# Altium PCB Relay_Controller_REV3.PcbDoc
Units mm, origin at the board's own origin, x right, y up, seen from the top; angles counter-clockwise.
Board outline 127.25 x 101.6 mm, 2 copper layers (Top Layer, Bottom Layer); 81 components, 50 nets, 297 pads, 98 vias.
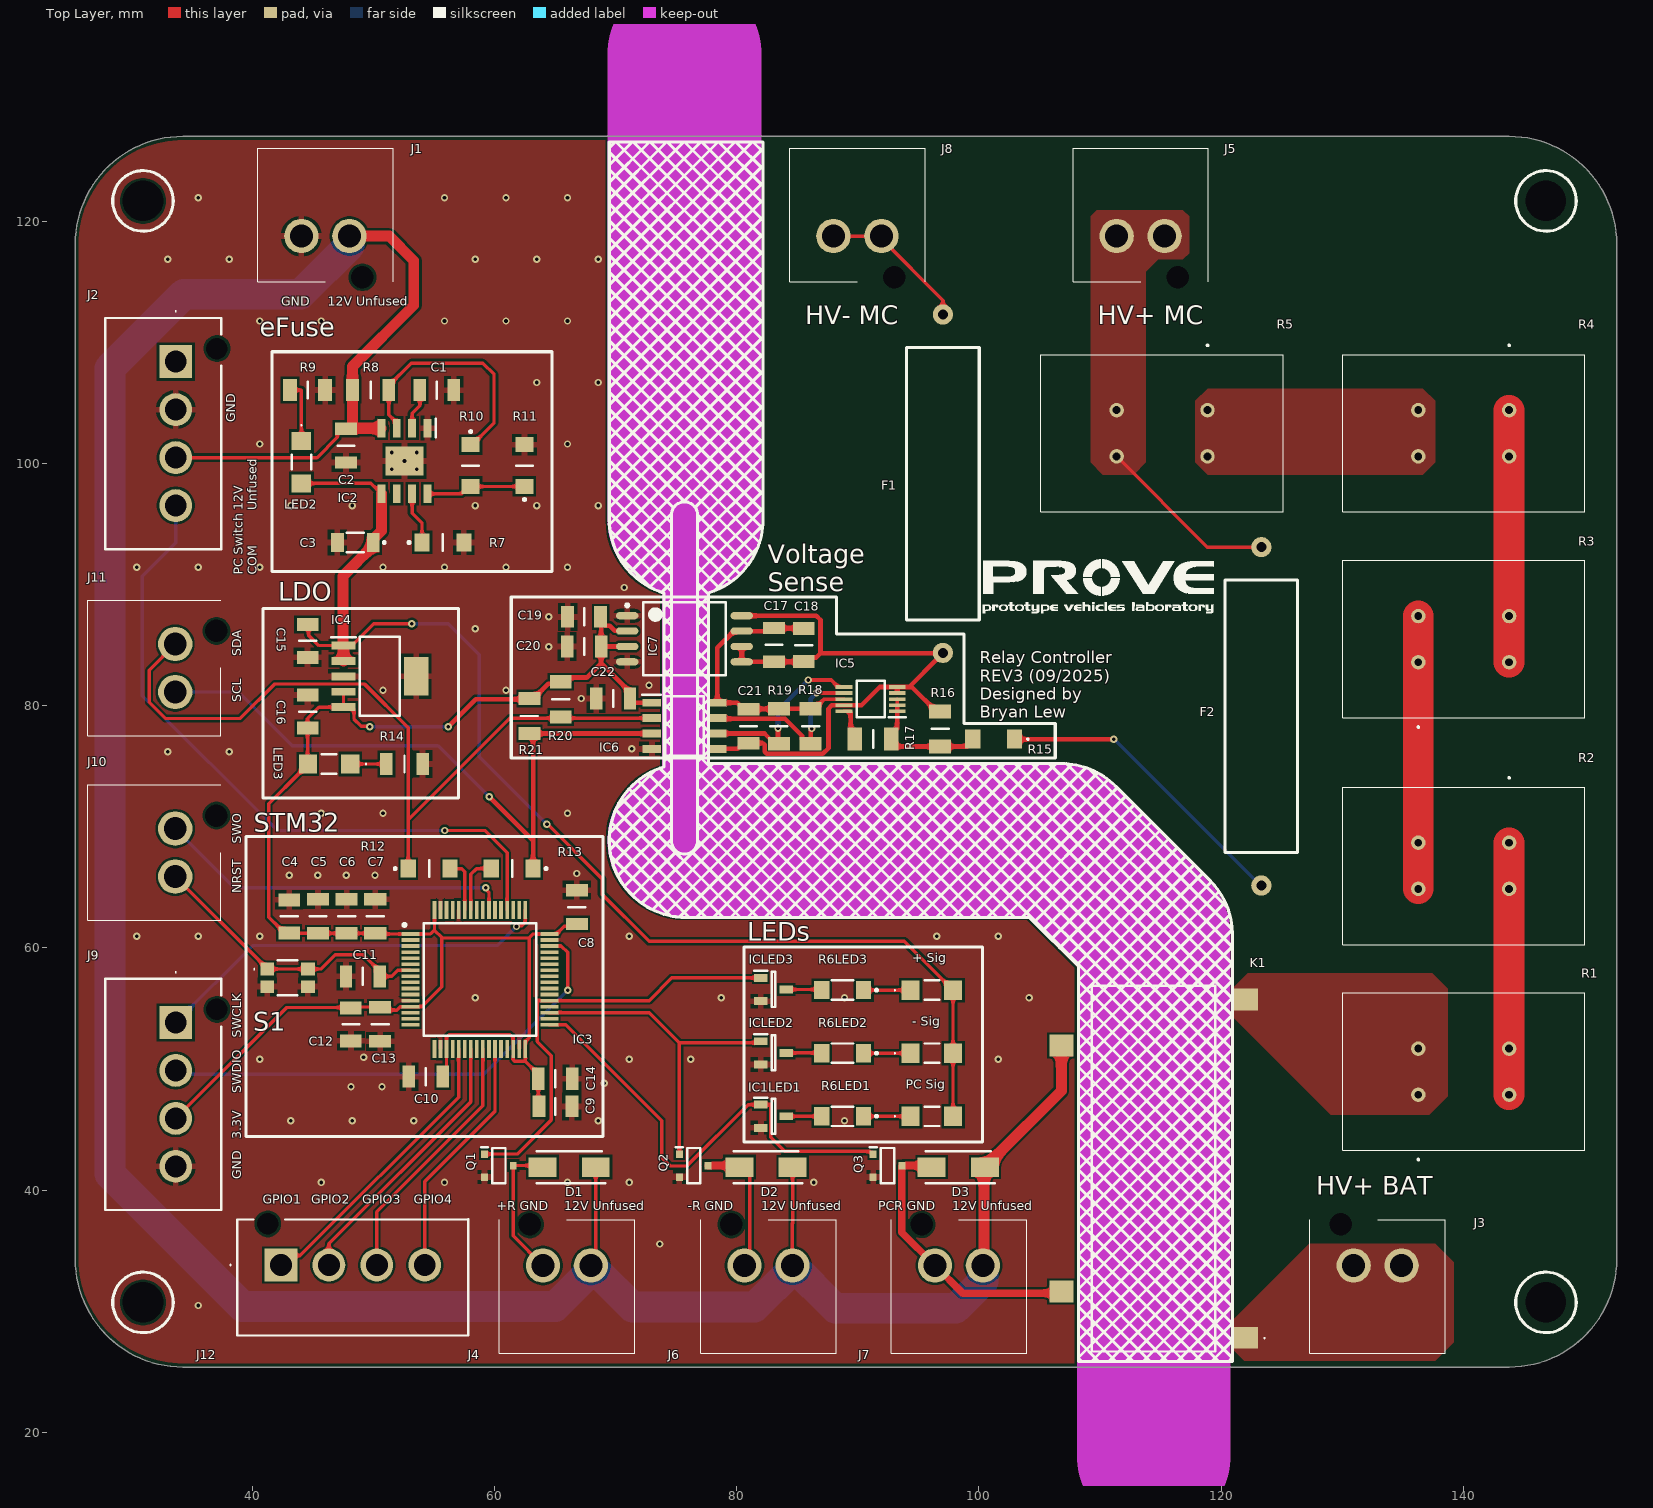
[diagram p0: Top Layer view]
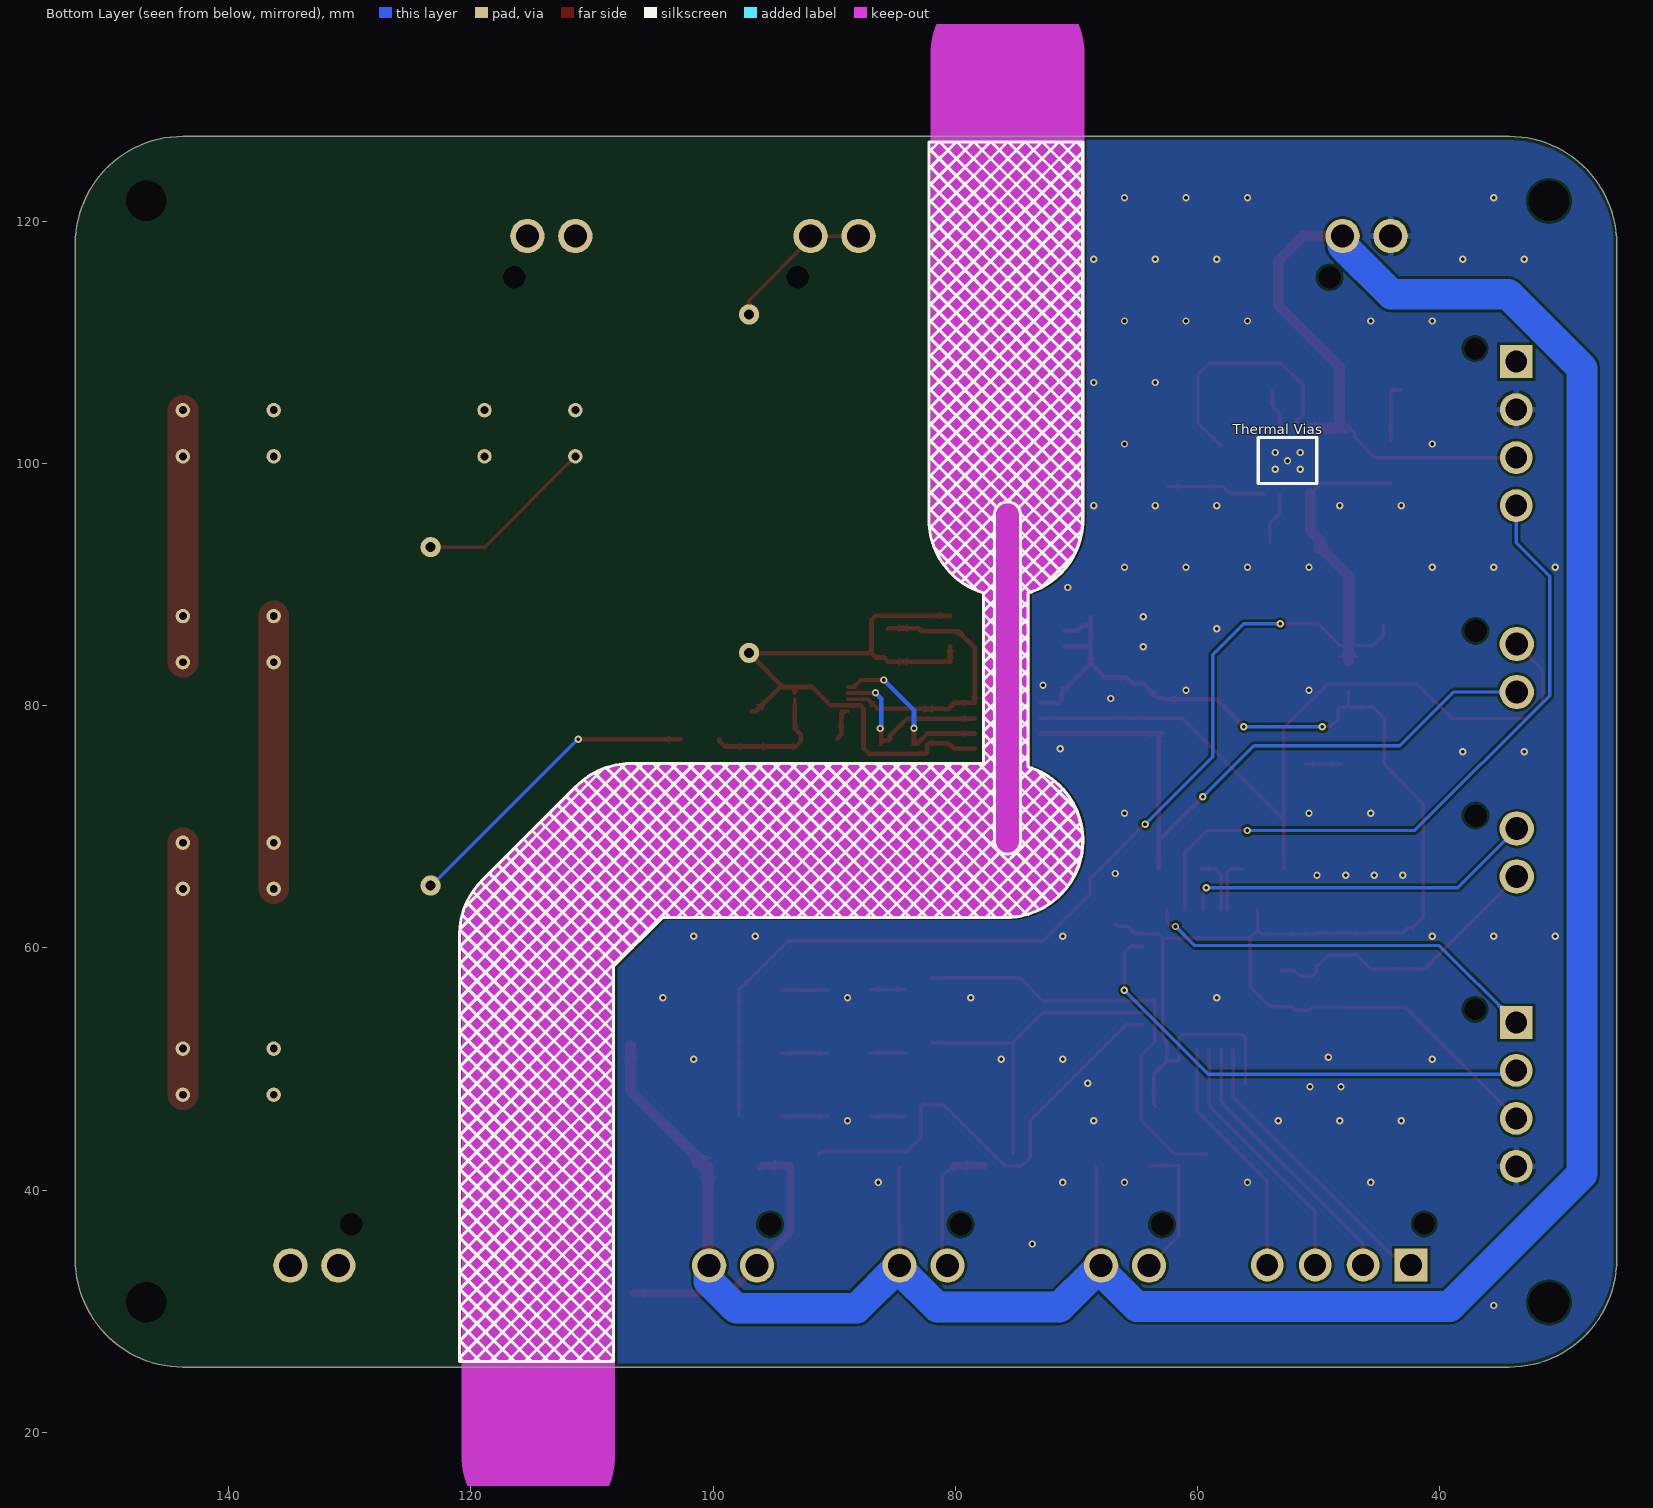
[diagram p1: Bottom Layer view, seen from below]
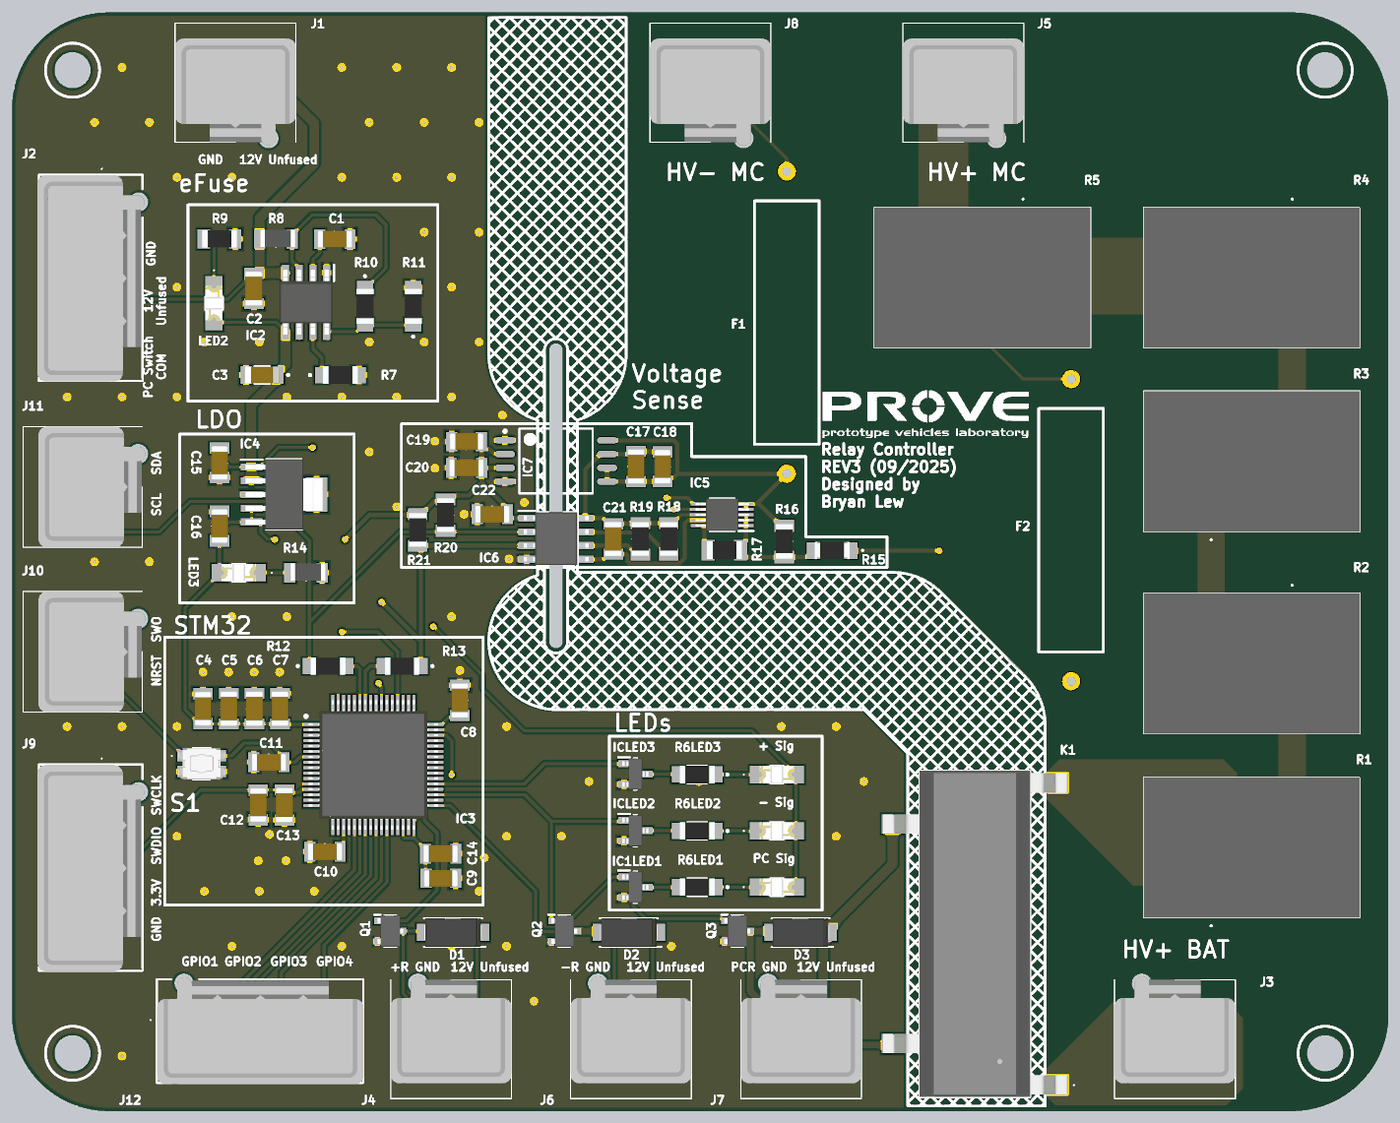
[diagram p2: 3D render of the assembled board from above, using the file's embedded part models]

## Layer stack, top to bottom
Top Solder: solder mask 0.0102, Solder Resist, Dk 3.5
Top Layer: signal copper 0.0356
Dielectric 1: dielectric 0.32, FR-4, Dk 4.8
Bottom Layer: signal copper 0.0356
Bottom Solder: solder mask 0.0102, Solder Resist, Dk 3.5

## Board outline
25.4,34.29 25.4,118.11 cw(c34.29,118.11) 34.29,127 143.764,127 cw(c143.764,118.11) 152.654,118.11 152.654,34.29 cw(c143.764,34.29) 143.764,25.4 34.29,25.4 cw(c34.29,34.29)
cut-out: 75.057,68.834 ccw(c75.692,68.834) 76.327,68.834 76.327,95.758 ccw(c75.692,95.758) 75.057,95.758

## Design rules (kind name [scope] priority, off if disabled: settings)
BoardOutlineClearance [All] p1: gap=0.3 ignorepadtopadclearanceinfootprint=FALSE except(0.4: Arc-SplitBarrior Arc-SplitContinuation Track-SplitBarrior Track-SplitContinuation SMDPad-SplitBarrior SMDPad-SplitContinuation THPad-SplitBarrior THPad-SplitContinuation Via-SplitBarrior Via-SplitContinuation Fill-SplitBarrior Fill-SplitContinuation Poly-SplitBarrior Poly-SplitContinuation Region-SplitBarrior Region-SplitContinuation Text-SplitBarrior Text-SplitContinuation)
Clearance "Clearance Different Nets" [All] p1: gap=0.2 ignorepadtopadclearanceinfootprint=FALSE except(0.089: Arc-Arc Arc-Track Arc-SMDPad Track-Track Track-SMDPad; 0.127: SMDPad-SMDPad SMDPad-Via THPad-Via Via-Via; 0.254: Arc-Via Arc-Text Track-Via Track-Text SMDPad-Text THPad-Text Via-Text Fill-Text Poly-Text Region-Text Text-Text; 0.5: THPad-THPad Via-Hole)
Clearance "Clearance Same Nets" [All] p2: gap=0.2 ignorepadtopadclearanceinfootprint=FALSE except(0.089: Arc-Arc Arc-Track Arc-SMDPad Track-Track Track-SMDPad SMDPad-SMDPad; 0.127: SMDPad-Via THPad-Via; 0.254: Arc-Via Arc-Text Track-Via Track-Text SMDPad-Text THPad-Text Via-Via Via-Text Fill-Text Poly-Text Region-Text Text-Text)
Clearance "Clearance Bottom Layer" [OnLayer('Bottom Layer')] p3: gap=0.203 ignorepadtopadclearanceinfootprint=TRUE except(0.254: Arc-Text Track-Text SMDPad-Text THPad-Text Via-Text Fill-Text Poly-Text Region-Text Text-Text)
Clearance "Clearance Top Layer" [OnLayer('Top Layer')] p4: gap=0.203 ignorepadtopadclearanceinfootprint=TRUE except(0.254: Arc-Text Track-Text SMDPad-Text THPad-Text Via-Text Fill-Text Poly-Text Region-Text Text-Text)
HoleSize [All] p1: absolutevalues=TRUE maxlimit=6.3 minlimit=0.2 maxpercent=80.000 minpercent=20.000
MinimumAnnularRing [All] p1: minimumring=0.13
MinimumSolderMaskSliver [All] p1: minsoldermaskwidth=0.1
PolygonConnect PolygonConnectPowerPads [InPolygonClass('PowerPolygons')] p1: connectstyle=Direct reliefconductorwidth=0.254 reliefentries=4 polygonreliefangle="90 Angle" airgapwidth=0.254
PolygonConnect PolygonConnect_1 [All] p2: thpad.connectstyle=Relief thpad.reliefconductorwidth=0.508 thpad.reliefentries=4 thpad.polygonreliefangle="90 Angle" thpad.airgapwidth=0.254 smdpad.connectstyle=Relief smdpad.reliefconductorwidth=0.508 smdpad.reliefentries=4 smdpad.polygonreliefangle="90 Angle" smdpad.airgapwidth=0.254 via.connectstyle=Direct via.reliefconductorwidth=0.508 via.reliefentries=4 via.polygonreliefangle="90 Angle" via.airgapwidth=0.254
RoutingCorners [All] p1: cornerstyle=Round minsetback=2.54 maxsetback=2.54
RoutingVias [All] p1: holewidth=0.5 width=1 viastyle="Through Hole" minholewidth=0.2 minwidth=0.35 maxholewidth=1 maxwidth=2
SilkToSilkClearance [All] p1: silktosilkclearance=0.1
SilkToSolderMaskClearance [IsPad] p1: minsilkscreentomaskgap=0.1 clearancetoexposedcopper=TRUE
SolderMaskExpansion [All] p1: expansion=0.102 istentingtop=FALSE
SupplyNets "Schematic Supply Nets" [InNet('GND')] p1: voltage=0.000
Width [All] p1: maxlimit=2.54 minlimit=0.089 preferedwidth=0.381
25 further rules are at their usual default settings.

## Classes and differential pairs
component class "3.3V Isolation": C17 C18 C19 C20 IC7
polygon class PowerPolygons: HV+_BAT_L01_P007 HV+_MC_UNFUSED_L01_P010 NETK1_2_L01_P009 NETR4_2_L01_P008
channel class LED_Driver: U_LED1 U_LED2 U_LED3
component class VoltageSense: C21 C22 F1 F2 IC5 IC6 R15 R16 R17 R18 R19 R20 R21
component class U_LED3: IC1_U_LED3 LED1_U_LED3 R6_U_LED3
component class U_LED2: IC1_U_LED2 LED1_U_LED2 R6_U_LED2
component class U_LED1: IC1_U_LED1 LED1_U_LED1 R6_U_LED1
component class STM32: C4 C5 C6 C7 C8 C9 C10 C11 C12 C13 C14 IC3 R12 R13 S1
component class "Relay Controller": D1 D2 D3 K1 Q1 Q2 Q3 R1 R2 R3 R4 R5
component class eFuse: C1 C2 C3 IC2 LED2 R7 R8 R9 R10 R11
component class Connectors: J1 J2 J3 J4 J5 J6 J7 J8 J9 J10 J11 J12
component class "12V to 3.3V LDO": C15 C16 IC4 LED3 R14

## Components (designator, comment, footprint, x,y, rotation, side; value= is the part's Value field where it differs from the comment)
"+ Sig" "156120VS75000" 156120VS75000 96.114,56.515 r0 top (schematic designator LED1)
"- Sig" "156120VS75000" 156120VS75000 96.114,51.308 r0 top (schematic designator LED1)
C1 "2.2n" CAPC3216X94N 55.245,106.045 r0 top
C2 "100n" CAPC3216X94N 47.752,101.473 r270 top
C3 "100u" GRM31x 48.514,93.472 r180 top
C4 "4.7u" CAPC3216X180N 43.053,62.611 r90 top
C5 "100n" CAPC3216X94N 45.437,62.611 r90 top
C6 "100n" CAPC3216X94N 47.801,62.611 r90 top
C7 "100n" CAPC3216X94N 50.165,62.611 r90 top
C8 "100n" CAPC3216X94N 66.802,63.373 r90 top
C9 "100n" CAPC3216X94N 65.024,49.2 r0 top
C10 "100n" CAPC3216X94N 54.331,49.378 r180 top
C11 "100n" CAPC3216X94N 49.149,57.658 r180 top
C12 "1u" CAPC3216X180N 48.158,53.696 r270 top
C13 "100n" CAPC3216X94N 50.571,53.696 r270 top
C14 "4.7u" CAPC3216X180N 65.039,46.914 r0 top
C15 "10u" CAPC3216X180N 44.577,85.344 r270 top
C16 "10u" CAPC3216X180N 44.577,79.502 r90 top
C17 "100n" CAPC3216X94N 83.083,85.014 r270 top
C18 "22u" CAPC3216X180N 85.547,84.999 r270 top
C19 "10u" CAPC3216X180N 67.412,87.325 r180 top
C20 "100n" CAPC3216X94N 67.412,84.887 r180 top
C21 "100n" CAPC3216X94N 80.975,78.308 r270 top
C22 "100n" CAPC3216X94N 69.8,80.594 r180 top
D1 "RGF1M-E3_67A" DIOM5426X300N 66.167,41.907 r180 top
D2 "RGF1M-E3_67A" DIOM5426X300N 82.423,41.907 r180 top
D3 "RGF1M-E3_67A" DIOM5426X300N 98.298,41.907 r180 top
F1 "0ADKP0500-RE" 0ADKP0500-RE 97.028,98.323 r270 top locked
F2 "0ADKP0500-RE" 0ADKP0500-RE 123.317,79.121 r90 top locked
IC1LED1 "DMN61D8LQ-13" SOT96P240X110-3N 83.033,46.101 r0 top (schematic designator IC1)
IC2 "TPS259630DDAR" SOIC127P600X170-9N 52.578,100.203 r270 top locked
IC3 "STM32F401RET7" QFP50P1200X1200X160-64N 58.801,57.404 r0 top
IC4 "TL1963A-33DCQT" SOT127P706X180-6N 50.546,82.423 r0 top
IC5 "LTC4151IMS#PBF" SOP50P490X110-10N 91.059,80.543 r180 top
IC6 "ISO1640BQDRQ1" SOIC127P600X175-8N 75.698,78.334 r0 top
IC7 "MIE05W0505BGYE-3R-Z" SOIC127P1030X265-8N 75.692,85.522 r0 top
ICLED2 "DMN61D8LQ-13" SOT96P240X110-3N 83.033,51.336 r0 top (schematic designator IC1)
ICLED3 "DMN61D8LQ-13" SOT96P240X110-3N 83.033,56.571 r0 top (schematic designator IC1)
J1 "1877285-2" 18772852 46.049,115.007 r180 top
J2 "1877285-4" 18772854 33.695,108.4 r270 top
J3 "1877285-2" 18772852 132.917,37.542 r0 top
J4 "1877285-2" 18772852 65.988,37.542 r0 top
J5 "1877285-2" 18772852 113.352,115.007 r180 top
J6 "1877285-2" 18772852 82.625,37.542 r0 top
J7 "1877285-2" 18772852 98.35,37.542 r0 top
J8 "1877285-2" 18772852 89.968,115.007 r180 top
J9 "1877285-4" 18772854 33.695,53.848 r270 top
J10 "1877285-2" 18772852 37.415,67.87 r270 top
J11 "1877285-2" 18772852 37.415,83.11 r270 top
J12 "1877285-4" 18772854 42.372,33.822 r0 top
K1 "KT12-1A-40L-SMD" KT121A40LSMD 114.427,41.783 r90 top locked
LED2 "156120VS75000" 156120VS75000 44.069,100.104 r270 top locked
LED3 "156120VS75000" 156120VS75000 46.355,75.184 r180 top
"PC Sig" "156120VS75000" 156120VS75000 96.114,46.101 r0 top (schematic designator LED1)
Q1 "SSM3K357R,LF" SOTFL95P240X88-3N 60.37,42.035 r0 top
Q2 "SSM3K357R,LF" SOTFL95P240X88-3N 76.454,42.035 r0 top
Q3 "SSM3K357R,LF" SOTFL95P240X88-3N 92.456,42.035 r0 top
R1 "TWW20J100E" TWW20J100E 136.271,47.879 r0 top
R2 "TWW20J100E" TWW20J100E 143.771,68.687 r180 top
R3 "TWW20J100E" TWW20J100E 136.271,83.586 r0 top
R4 "TWW20J100E" TWW20J100E 143.771,104.394 r180 top locked
R5 "TWW20J100E" TWW20J100E 118.872,104.394 r180 top
R6LED1 "ERA-8VEB4750V" ERA8KEB1004V 88.748,46.101 r180 top (schematic designator R6)
R6LED2 "ERA-8VEB4750V" ERA8KEB1004V 88.748,51.308 r180 top (schematic designator R6)
R6LED3 "ERA-8VEB4750V" ERA8KEB1004V 88.748,56.515 r180 top (schematic designator R6)
R7 "909" ERJ8ENF1000V 55.753,93.472 r0 top
R8 "464k" RESC3216X60N 49.784,106.055 r0 top
R9 "0.51k" RESC3216X65N 44.577,106.055 r0 top
R10 "33.2k" ERJ8ENF1000V 58.039,99.822 r270 top
R11 "47.5k" ERJ8ENF1000V 62.484,99.822 r90 top
R12 "33" ERJ8ENF1000V 54.61,66.548 r0 top
R13 "33" ERJ8ENF1000V 61.468,66.548 r180 top
R14 "62" RESC3216X60N 52.578,75.184 r0 top
R15 "330k" ERJP08_(1206) 101.219,77.241 r180 top
R16 "100k" RESC3216X65N 96.799,78.08 r90 top
R17 "0.02" RESC3216X68N 91.262,77.267 r180 top
R18 "2k" RESC3116X65N 86.106,78.308 r270 top
R19 "2k" RESC3116X65N 83.49,78.308 r270 top
R20 "2k" RESC3116X65N 65.481,80.518 r270 top
R21 "2k" RESC3116X65N 62.89,79.146 r270 top
S1 "TL1030AF350AQJ" TL1030AF350AQJ 42.926,57.531 r0 top

## Footprints (in the part's own frame and the unit in brackets; to place one, negate y for a bottom-side part, rotate by r counter-clockwise, add the part's x,y. Pads: shape width x height; smd on the part's side, far side on the other; paste and mask are expansions set on the pad)
0ADKP0500-RE [mil]
  round 66 hole 33: 1(-550,0) 2(550,0)
  Multi-Layer pour cut-out: -443,118 -443,-118 443,-118 443,118
  silkscreen extent -443,-118 443,118
156120VS75000 [mm]
  rect 1.5x1.6 smd: 1(-1.75,0) 2(1.75,0)
  silkscreen extent -3.1,-0.8 0.6,0.8, body extent -1.6,-0.8 1.6,0.8, height 1.2
18772852 [mm]
  round 2.835 hole 1.89: 1(-1.98,-3.76) 2(1.98,-3.76)
  round 0.93 hole 1.86 unplated: 3(-3.06,-0.36)
  silkscreen extent -5.59,-11 5.59,0, body extent -5.59,-9.58 5.59,0.3, height 11.91
18772854 [mm]
  rect 2.715x2.715 hole 1.81: 1(0,0)
  round 2.715 hole 1.81: 2(3.96,0) 3(7.92,0) 4(11.88,0)
  round 0.89 hole 1.78 unplated: 5(-1.08,3.4)
  silkscreen extent -4.2,-5.82 15.49,3.77, body extent -3.56,-5.96 15.53,3.93, height 11.86
CAPC3216X94N [mm]
  rect 1.02x1.82 smd: 1(-1.4,0) 2(1.4,0)
  silkscreen extent 0,-0.7 0,0.7, body extent -1.6,-0.8 1.6,0.8, height 0.94
CAPC3216X180N [mm]
  rect 1.07x1.78 smd: 1(-1.36,0) 2(1.36,0)
  silkscreen extent 0,-0.7 0,0.7, body extent -1.6,-0.8 1.6,0.8, height 1.8
DIOM5426X300N [mm]
  rect 2.3x1.6 smd: 1(-2.2,0) 2(2.2,0)
  silkscreen extent -3,-1.32 2.68,1.32, body extent -2.68,-1.32 2.68,1.32, height 3
ERA8KEB1004V [mm]
  rect 1.25x1.5 smd: 1(-1.725,0) 2(1.725,0)
  silkscreen extent -2.9,-0.8 0.9,0.8, body extent -1.6,-0.8 1.6,0.8, height 0.65
ERJ8ENF1000V [mm]
  rect 1.25x1.5 smd: 1(-1.725,0) 2(1.725,0)
  silkscreen extent -2.9,-0.67 0,0.67, body extent -1.6,-0.8 1.6,0.8, height 0.6
ERJP08_(1206) [mm]
  rect 1.25x1.55 smd: 1(-1.725,0) 2(1.725,0)
  silkscreen extent -2.88,-0.05 -2.78,0.05, body extent -1.6,-0.8 1.6,0.8, height 0.6
GRM31x [mm]
  rect 1.05x1.6 smd: 1(-1.475,0) 2(1.475,0)
  silkscreen extent -2.5,-0.8 0.7,0.8, body extent -1.6,-0.8 1.6,0.8, height 1
KT121A40LSMD [mm]
  rect 1.8x2 smd: 1(-13.97,-7.62) 2(13.97,-7.62) 3(10.15,7.62) 4(-10.15,7.62)
  silkscreen extent -15.1,-9.2 15.1,5.1, body extent -15.1,-8.5 15.1,8.5, height 8.71
QFP50P1200X1200X160-64N [mm]
  rect 1.475x0.3 smd: 1(-5.738,3.75) 2(-5.738,3.25) 3(-5.738,2.75) 4(-5.738,2.25) 5(-5.738,1.75) 6(-5.738,1.25) 7(-5.738,0.75) 8(-5.738,0.25) 9(-5.738,-0.25) 10(-5.738,-0.75) 11(-5.738,-1.25) 12(-5.738,-1.75) 13(-5.738,-2.25) 14(-5.738,-2.75) 15(-5.738,-3.25) 16(-5.738,-3.75) 33(5.738,-3.75) 34(5.738,-3.25) 35(5.738,-2.75) 36(5.738,-2.25) 37(5.738,-1.75) 38(5.738,-1.25) 39(5.738,-0.75) 40(5.738,-0.25) 41(5.738,0.25) 42(5.738,0.75) 43(5.738,1.25) 44(5.738,1.75) 45(5.738,2.25) 46(5.738,2.75) 47(5.738,3.25) 48(5.738,3.75)
  rect 0.3x1.475 smd: 17(-3.75,-5.738) 18(-3.25,-5.738) 19(-2.75,-5.738) 20(-2.25,-5.738) 21(-1.75,-5.738) 22(-1.25,-5.738) 23(-0.75,-5.738) 24(-0.25,-5.738) 25(0.25,-5.738) 26(0.75,-5.738) 27(1.25,-5.738) 28(1.75,-5.738) 29(2.25,-5.738) 30(2.75,-5.738) 31(3.25,-5.738) 32(3.75,-5.738) 49(3.75,5.738) 50(3.25,5.738) 51(2.75,5.738) 52(2.25,5.738) 53(1.75,5.738) 54(1.25,5.738) 55(0.75,5.738) 56(0.25,5.738) 57(-0.25,5.738) 58(-0.75,5.738) 59(-1.25,5.738) 60(-1.75,5.738) 61(-2.25,5.738) 62(-2.75,5.738) 63(-3.25,5.738) 64(-3.75,5.738)
  silkscreen extent -6.35,-4.65 4.65,4.65, body extent -6,-6 6,6, height 1.6
RESC3116X65N [mm]
  rect 1.1x1.8 smd: 1(-1.45,0) 2(1.45,0)
  silkscreen extent 0,-0.7 0,0.7, body extent -1.55,-0.8 1.55,0.8, height 0.65
RESC3216X60N [mm]
  rect 1.05x1.8 smd: 1(-1.5,0) 2(1.5,0)
  silkscreen extent 0,-0.7 0,0.7, body extent -1.42,-0.74 1.78,0.86, height 0.55
RESC3216X65N [mm]
  rect 1.15x1.8 smd: 1(-1.45,0) 2(1.45,0)
  silkscreen extent 0,-0.7 0,0.7, body extent -1.6,-0.8 1.6,0.8, height 0.65
RESC3216X68N [mm]
  rect 1.2x1.9 smd: 1(-1.5,0) 2(1.5,0)
  silkscreen extent 0,-0.72 0,0.72, body extent -1.6,-0.82 1.6,0.82, height 0.68
SOIC127P600X170-9N [mm]
  rect 1.525x0.65 smd: 1(-2.712,1.905) 2(-2.712,0.635) 3(-2.712,-0.635) 4(-2.712,-1.905) 5(2.712,-1.905) 6(2.712,-0.635) 7(2.712,0.635) 8(2.712,1.905)
  rect 2.4x3.1 smd: 9(0,0)
  silkscreen extent -3.47,2.58 -1.95,2.58, body extent -3,-2.45 3,2.45, height 1.57
SOIC127P600X175-8N [mm]
  rect 1.525x0.65 smd: 1(-2.712,1.905) 2(-2.712,0.635) 3(-2.712,-0.635) 4(-2.712,-1.905) 5(2.712,-1.905) 6(2.712,-0.635) 7(2.712,0.635) 8(2.712,1.905)
  silkscreen extent -3.47,-2.45 1.6,2.58, body extent -3,-2.45 3,2.45, height 1.75
SOIC127P1030X265-8N [mm] "SOIC, 8-Leads, Body 5.85x7.50mm, Pitch 1.27mm, IPC Medium Density"
  oval 1.85x0.6 smd: 1(-4.725,1.905) 2(-4.725,0.635) 3(-4.725,-0.635) 4(-4.725,-1.905) 5(4.725,-1.905) 6(4.725,-0.635) 7(4.725,0.635) 8(4.725,1.905)
  silkscreen extent -4.85,-3 3.4,3, body extent -3.8,-3 3.8,3, height 2.65
SOP50P490X110-10N [mm]
  rect 1.4x0.3 smd: 1(-2.2,1) 2(-2.2,0.5) 3(-2.2,0) 4(-2.2,-0.5) 5(-2.2,-1) 6(2.2,-1) 7(2.2,-0.5) 8(2.2,0) 9(2.2,0.5) 10(2.2,1)
  silkscreen extent -2.9,-1.5 1.15,1.5, body extent -2.46,-1.5 2.46,1.5, height 1.1
SOT96P240X110-3N [mm]
  rect 1.1x0.65 smd: 1(-1.05,0.96) 2(-1.05,-0.96) 3(1.05,0)
  silkscreen extent -1.6,-1.45 0.15,1.54, body extent -1.2,-1.45 1.2,1.45, height 1.1
SOT127P706X180-6N [mm]
  rect 2x0.65 smd: 1(-3,2.54) 2(-3,1.27) 3(-3,0) 4(-3,-1.27) 5(-3,-2.54)
  rect 2x3.2 smd: 6(3,0)
  silkscreen extent -4,-3.25 1.65,3.25, body extent -3.55,-3.25 3.55,3.25, height 1.66
SOTFL95P240X88-3N [mm]
  rect 0.575x0.62 smd: 1(-1.188,0.95) 2(-1.188,-0.95) 3(1.188,0)
  silkscreen extent -1.48,-1.45 0.55,1.51, body extent -1.2,-1.45 1.2,1.45, height 0.88
TL1030AF350AQJ [mm]
  rect 1.15x1.05 smd: 1(-1.675,0.725) 2(-1.675,-0.725) 3(1.675,0.725) 4(1.675,-0.725)
  silkscreen extent -2.8,-1.45 0.8,1.45, body extent -2.16,-1.45 2.16,1.45, height 1.71
TWW20J100E [mm]
  round 1.192 hole 0.65: 1(0,0) 2(7.5,0) 3(7.5,3.81) 4(0,3.81)
  silkscreen extent -6.25,-5.4 13.75,8.4, body extent -6.25,-4.59 13.75,8.4, height 46.1

## Part data
"+ Sig" "- Sig" LED2 LED3 "PC Sig": "LED", Manufacturer_Name="Wurth Elektronik", Mouser Part Number=710-156120VS75000, Datasheet Link=https://www.we-online.com/components/products/datasheet/156120VS75000.pdf, Height=1.3mm, Manufacturer_Part_Number=156120VS75000, Mouser Price/Stock=https://www.mouser.co.uk/ProductDetail/Wurth-Elektronik/156120VS75000?qs=2kOmHSv6VfQAUFg5BeuEfQ%3D%3D
C1: library part 1206YC222KAT2A, "Capacitor", Manufacturer_Name="Kyocera AVX", Mouser Part Number=581-1206YC222KAT2A, Manufacturer_Part_Number=1206YC222KAT2A, Mouser Price/Stock=https://www.mouser.co.uk/ProductDetail/AVX/1206YC222KAT2A?qs=CvOUr%252B7YgU7sng%252BvNa2zXQ%3D%3D
C2 C5 C6 C7 C8 C9 C10 C11 C13 C17 C20 C21 C22: library part 12065C104J4Z2A, "Capacitor", Manufacturer_Name="Kyocera AVX", Mouser Part Number=581-12065C104J4Z2A, Datasheet Link=https://spicat.kyocera-avx.com/product/mlcc/chartview/12065C104J4Z2A/DataSheet/X7R, Height=0.94mm, Manufacturer_Part_Number=12065C104J4Z2A, Mouser Price/Stock=https://www.mouser.com/Search/Refine.aspx?Keyword=581-12065C104J4Z2A
C3: library part GRM31CR60J107KEA8L, "Capacitor", Manufacturer_Name="Murata Electronics", Mouser Part Number=81-GRM31CR60J107KE8L, Datasheet Link=https://search.murata.co.jp/Ceramy/image/img/A01X/G101/ENG/GRM31CR60J107KEA8-01A.pdf, Height=1.25mm, Manufacturer_Part_Number=GRM31CR60J107KEA8L, Mouser Price/Stock=https://www.mouser.co.uk/ProductDetail/Murata-Electronics/GRM31CR60J107KEA8L?qs=pUKx8fyJudDzdyEEakAKPA%3D%3D
C4 C14: library part GMK316AB7475KLHT, "Capacitor", Manufacturer_Name="TAIYO YUDEN", Mouser Part Number=963-GMK316AB7475KLHT, Arrow Part Number=GMK316AB7475KLHT, Arrow Price/Stock=https://www.arrow.com/en/products/gmk316ab7475klht/taiyo-yuden?utm_currency=USD&region=nac, Datasheet Link=https://ds.yuden.co.jp/TYCOMPAS/ap/specSheet?pn=MMASG31LAB7475KTNA01, Height=1.8mm, Manufacturer_Part_Number=GMK316AB7475KLHT, Mouser Price/Stock=https://www.mouser.co.uk/ProductDetail/TAIYO-YUDEN/GMK316AB7475KLHT?qs=CNQs48zzdnoeKLJ9%2F6WNWQ%3D%3D
C12: library part HMK316B7105KLHT, "Capacitor", Manufacturer_Name="TAIYO YUDEN", Mouser Part Number=963-HMK316B7105KLHT, Arrow Part Number=HMK316B7105KLHT, Arrow Price/Stock=null?utm_currency=USD&region=nac, Datasheet Link=https://mouser.componentsearchengine.com/Datasheets/1/HMK316B7105KLHT.pdf, Height=1.8mm, Manufacturer_Part_Number=HMK316B7105KLHT, Mouser Price/Stock=https://www.mouser.co.uk/ProductDetail/TAIYO-YUDEN/HMK316B7105KLHT?qs=sz8xDBnIhcFmvpGfTAF0nQ%3D%3D
C15 C16 C19: library part MLASU31LBB5106KTNA01, "Capacitor", Manufacturer_Name="TAIYO YUDEN", Datasheet Link=https://mm.digikey.com/Volume0/opasdata/d220001/medias/docus/5731/MLR01_e.pdf, Height=1.8mm, Manufacturer_Part_Number=MLASU31LBB5106KTNA01
C18: library part GGM31CD70J226KE02L, "Capacitor", Manufacturer_Name="Murata Electronics", Datasheet Link=https://search.murata.co.jp/Ceramy/image/img/A01X/G101/ENG/GGM31CD70J226KE02-01.pdf, Height=1.8mm, Manufacturer_Part_Number=GGM31CD70J226KE02L
D1 D2 D3: "Diode", Arrow Part Number=RGF1M-E3/67A, Manufacturer_Name=Vishay, Mouser Part Number=625-RGF1M-E3, Arrow Price/Stock=https://www.arrow.com/en/products/rgf1m-e367a/vishay?region=nac, Datasheet Link=https://www.vishay.com/docs/88697/rgf1.pdf, Height=3mm, Manufacturer_Part_Number=RGF1M-E3/67A, Mouser Price/Stock=https://www.mouser.co.uk/ProductDetail/Vishay-General-Semiconductor/RGF1M-E3-67A?qs=4xyK702%2F%252BQ1dl%252BTCdyIThg%3D%3D
F1 F2: "Fuse"
IC1LED1 ICLED2 ICLED3: "Integrated Circuit", Manufacturer_Name="Diodes Incorporated", Mouser Part Number=621-DMN61D8LQ-13, Arrow Part Number=DMN61D8LQ-13, Arrow Price/Stock=https://www.arrow.com/en/products/dmn61d8lq-13/diodes-incorporated?utm_currency=USD&region=nac, Datasheet Link=https://www.diodes.com//assets/Datasheets/DMN61D8LQ.pdf, Height=1.1mm, Manufacturer_Part_Number=DMN61D8LQ-13, Mouser Price/Stock=https://www.mouser.co.uk/ProductDetail/Diodes-Incorporated/DMN61D8LQ-13?qs=DBvH5xl4UymJgoulTjiNCg%3D%3D
IC2: "Integrated Circuit", Manufacturer_Name="Texas Instruments", Mouser Part Number=595-TPS259630DDAR, Arrow Part Number=TPS259630DDAR, Arrow Price/Stock=https://www.arrow.com/en/products/tps259630ddar/texas-instruments, Datasheet Link=https://www.ti.com/lit/gpn/TPS2596, Height=1.7mm, Manufacturer_Part_Number=TPS259630DDAR, Mouser Price/Stock=https://www.mouser.co.uk/ProductDetail/Texas-Instruments/TPS259630DDAR?qs=T3oQrply3y%252BCA0rOFESTyA%3D%3D
IC3: "Integrated Circuit", Manufacturer_Name=STMicroelectronics, Mouser Part Number=511-STM32F401RET7, Arrow Part Number=STM32F401RET7, Arrow Price/Stock=https://www.arrow.com/en/products/stm32f401ret7/stmicroelectronics?utm_currency=USD&region=nac, Datasheet Link=https://www.arrow.com/en/products/stm32f401ret7/stmicroelectronics, Height=1.6mm, Manufacturer_Part_Number=STM32F401RET7, Mouser Price/Stock=https://www.mouser.co.uk/ProductDetail/STMicroelectronics/STM32F401RET7?qs=aVyJF2WnouSdX21y3k%2FIAA%3D%3D
IC4: "Integrated Circuit", Manufacturer_Name="Texas Instruments", Mouser Part Number=595-TL1963A-33DCQT, Arrow Part Number=TL1963A-33DCQT, Arrow Price/Stock=https://www.arrow.com/en/products/tl1963a-33dcqt/texas-instruments?utm_currency=USD&region=nac, Datasheet Link=http://www.ti.com/lit/gpn/TL1963A, Height=1.8mm, Manufacturer_Part_Number=TL1963A-33DCQT, Mouser Price/Stock=https://www.mouser.co.uk/ProductDetail/Texas-Instruments/TL1963A-33DCQT?qs=g0HfZ8wh75AyKD2vs560PQ%3D%3D
IC5: "Integrated Circuit", Manufacturer_Name="Analog Devices", Mouser Part Number=584-LTC4151IMS#PBF, Arrow Part Number=LTC4151IMS#PBF, Arrow Price/Stock=https://www.arrow.com/en/products/ltc4151imspbf/analog-devices?region=europe, Datasheet Link=http://www.linear.com/docs/26089, Height=1.1mm, Manufacturer_Part_Number=LTC4151IMS#PBF, Mouser Price/Stock=https://www.mouser.co.uk/ProductDetail/Analog-Devices/LTC4151IMSPBF?qs=hVkxg5c3xu%2F2n6Fpk%2FlWrA%3D%3D
IC6: "Integrated Circuit", Manufacturer_Name="Texas Instruments", Mouser Part Number=595-ISO1640BQDRQ1, Arrow Part Number=ISO1640BQDRQ1, Arrow Price/Stock=https://www.arrow.com/en/products/iso1640bqdrq1/texas-instruments?region=nac, Datasheet Link=https://www.ti.com/lit/ds/symlink/iso1640.pdf, Height=1.75mm, Manufacturer_Part_Number=ISO1640BQDRQ1, Mouser Price/Stock=https://www.mouser.co.uk/ProductDetail/Texas-Instruments/ISO1640BQDRQ1?qs=QNEnbhJQKvat3Z1mRPODGw%3D%3D
J1 J3 J4 J5 J6 J7 J8 J10 J11: "Connector", Manufacturer_Name="TE Connectivity", Mouser Part Number=571-1877285-2, Arrow Part Number=1877285-2, Arrow Price/Stock=https://www.arrow.com/en/products/1877285-2/te-connectivity?region=europe, Datasheet Link=https://www.te.com/commerce/DocumentDelivery/DDEController?Action=srchrtrv&DocNm=7-1773458-5_ECONOMY_POWER_QRG&DocType=Data%20Sheet&DocLang=English&PartCntxt=1877285-2&DocFormat=pdf, Height=12mm, Manufacturer_Part_Number=1877285-2, Mouser Price/Stock=https://www.mouser.co.uk/ProductDetail/TE-Connectivity/1877285-2?qs=ka3zfMQDmFlAIZq5pDt5JA%3D%3D
J2 J9 J12: "Connector", Manufacturer_Name="TE Connectivity", Mouser Part Number=571-1877285-4, Arrow Part Number=1877285-4, Arrow Price/Stock=https://www.arrow.com/en/products/1877285-4/te-connectivity?region=nac, Datasheet Link=https://www.te.com/commerce/DocumentDelivery/DDEController?Action=srchrtrv&DocNm=1877285&DocType=Customer%20Drawing&DocLang=English&PartCntxt=1877285-4&DocFormat=pdf, Height=12.5mm, Manufacturer_Part_Number=1877285-4, Mouser Price/Stock=https://www.mouser.co.uk/ProductDetail/TE-Connectivity/1877285-4?qs=ka3zfMQDmFkZPBtotDIXvQ%3D%3D
K1: "Relay or Contactor", Manufacturer_Name=STANDEXMEDER, Mouser Part Number=876-KT12-1A-40L-SMD, Arrow Part Number=KT12-1A-40L-SMD, Arrow Price/Stock=https://www.arrow.com/en/products/kt12-1a-40l-smd/standex-meder-electronics, Datasheet Link=https://standexelectronics.com/resources/technical-library/technical-papers/datasheet-kt-series-reed-relay/, Height=8.7mm, Manufacturer_Part_Number=KT12-1A-40L-SMD
Q1 Q2 Q3: "MOSFET (N-Channel)", Manufacturer_Name=Toshiba, Mouser Part Number=757-SSM3K357RLF, Arrow Part Number=SSM3K357R,LF, Arrow Price/Stock=https://www.arrow.com/en/products/ssm3k357rlf/toshiba?utm_currency=USD&region=nac, Datasheet Link=https://toshiba.semicon-storage.com/info/docget.jsp?did=59207&prodName=SSM3K357R, Height=0.88mm, Manufacturer_Part_Number=SSM3K357R,LF, Mouser Price/Stock=https://www.mouser.co.uk/ProductDetail/Toshiba/SSM3K357RLF?qs=F5EMLAvA7ICLn4Y138U4bA%3D%3D
R1 R2 R3 R4 R5: "Resistor", Manufacturer_Name=Ohmite, Mouser Part Number=588-TWW20J100E, Datasheet Link=https://www.mouser.in/datasheet/2/303/res_tww_twm-1228653.pdf, Height=46mm, Manufacturer_Part_Number=TWW20J100E, Mouser Price/Stock=https://www.mouser.co.uk/ProductDetail/Ohmite/TWW20J100E?qs=PzGy0jfpSMsE3rbWfgqD2A%3D%3D
R6LED1 R6LED2 R6LED3: "Resistor", Manufacturer_Name=Panasonic, Mouser Part Number=667-ERA-8VEB4750V, Datasheet Link=https://industrial.panasonic.com/cdbs/www-data/pdf/RDM0000/RDM0000C331.pdf, Height=0.65mm, Manufacturer_Part_Number=ERA-8VEB4750V, Mouser Price/Stock=https://www.mouser.co.uk/ProductDetail/Panasonic/ERA-8VEB4750V?qs=By6Nw2ByBD36LBLC0KPpEw%3D%3D
R7: library part ERJ-8ENF9090V, "Resistor", Manufacturer_Name=Panasonic, Mouser Part Number=667-ERJ-8ENF9090V, Datasheet Link=https://industrial.panasonic.com/cdbs/www-data/pdf/RDA0000/AOA0000C86.pdf, Height=0.7mm, Manufacturer_Part_Number=ERJ-8ENF9090V, Mouser Price/Stock=https://www.mouser.co.uk/ProductDetail/Panasonic/ERJ-8ENF9090V?qs=Ow%252BOiPmaljFp7qjHXHnn0Q%3D%3D
R8: library part CRCW1206464KFKEA, "Resistor", Manufacturer_Name=Vishay, Mouser Part Number=71-CRCW1206-464K-E3, Datasheet Link=http://componentsearchengine.com/Datasheets/2/CRCW1206464KFKEA.pdf, Height=0.6mm, Manufacturer_Part_Number=CRCW1206464KFKEA, Mouser Price/Stock=https://www.mouser.co.uk/ProductDetail/Vishay-Dale/CRCW1206464KFKEA?qs=9sFvXT%252Bien0sktzQDV2mCw%3D%3D
R9: library part KTR18EZPJ511, "Resistor", Manufacturer_Name="ROHM Semiconductor", Mouser Part Number=755-KTR18EZPJ511, Datasheet Link=http://rohmfs.rohm.com/en/products/databook/datasheet/passive/resistor/chip_resistor/ktr.pdf, Height=0.65mm, Manufacturer_Part_Number=KTR18EZPJ511, Mouser Price/Stock=https://www.mouser.co.uk/ProductDetail/ROHM-Semiconductor/KTR18EZPJ511?qs=DyUWGjl%252BcVvm7MQRIM2yRQ%3D%3D
R10: library part ERJ-8ENF3322V, "Resistor", Manufacturer_Name=Panasonic, Mouser Part Number=667-ERJ-8ENF3322V, Arrow Part Number=ERJ-8ENF3322V, Arrow Price/Stock=https://www.arrow.com/en/products/erj-8enf3322v/panasonic, Datasheet Link=https://industrial.panasonic.com/cdbs/www-data/pdf/RDA0000/AOA0000C86.pdf, Height=0.7mm, Manufacturer_Part_Number=ERJ-8ENF3322V, Mouser Price/Stock=https://www.mouser.co.uk/ProductDetail/Panasonic/ERJ-8ENF3322V?qs=8%252BG0TiN%2FgVoP4ztf7NoJ7g%3D%3D
R11: library part ERJ-8ENF4752V, "Resistor", Manufacturer_Name=Panasonic, Mouser Part Number=667-ERJ-8ENF4752V, Arrow Part Number=ERJ-8ENF4752V, Arrow Price/Stock=https://www.arrow.com/en/products/erj-8enf4752v/panasonic, Datasheet Link=https://industrial.panasonic.com/cdbs/www-data/pdf/RDA0000/AOA0000C86.pdf, Height=0.7mm, Manufacturer_Part_Number=ERJ-8ENF4752V, Mouser Price/Stock=https://www.mouser.com/Search/Refine.aspx?Keyword=667-ERJ-8ENF4752V
R12 R13: library part ERJ-8ENF33R0V, "Resistor", Manufacturer_Name=Panasonic, Mouser Part Number=667-ERJ-8ENF33R0V, Datasheet Link=https://industrial.panasonic.com/cdbs/www-data/pdf/RDA0000/AOA0000C86.pdf, Height=0.7mm, Manufacturer_Part_Number=ERJ-8ENF33R0V, Mouser Price/Stock=https://www.mouser.co.uk/ProductDetail/Panasonic/ERJ-8ENF33R0V?qs=8%252BG0TiN%2FgVpb1yH%2F8k6uQg%3D%3D
R14: library part CRCW120662R0FKTA, "Resistor", Manufacturer_Name=Vishay, Mouser Part Number=71-CRCW1206-62, Height=0.6mm, Manufacturer_Part_Number=CRCW120662R0FKTA, Mouser Price/Stock=https://www.mouser.co.uk/ProductDetail/Vishay-Dale/CRCW120662R0FKTA?qs=ZNjI1vpoWDOW7%2FSNU3Zcgg%3D%3D
R15: library part ERJ-P08D3303V, "Resistor", Manufacturer_Name=Panasonic, Datasheet Link=http://industrial.panasonic.com/cdbs/www-data/pdf/RDO0000/AOA0000C331.pdf, Height=0.7mm, Manufacturer_Part_Number=ERJ-P08D3303V
R16: library part MCA12060C1003FP500, "Resistor", Manufacturer_Name=Vishay, Mouser Part Number=594-MCA12060C1003FP5, Datasheet Link=https://componentsearchengine.com/Datasheets/1/MCA12060C1003FP500.pdf, Height=0.65mm, Manufacturer_Part_Number=MCA12060C1003FP500, Mouser Price/Stock=https://www.mouser.com/Search/Refine.aspx?Keyword=594-MCA12060C1003FP5
R17: library part PCS1206DR0200ET, "Resistor", Manufacturer_Name=Ohmite, Mouser Part Number=588-PCS1206DR0200ET, Datasheet Link=https://componentsearchengine.com/Datasheets/1/PCS1206DR0200ET.pdf, Height=0.684mm, Manufacturer_Part_Number=PCS1206DR0200ET, Mouser Price/Stock=https://www.mouser.co.uk/ProductDetail/Ohmite/PCS1206DR0200ET?qs=Zz7%252BYVVL6bHe1REzh6xp%2Fw%3D%3D
R18 R19 R20 R21: library part CHP1206AFX-2001ELF, "Resistor", Manufacturer_Name=Bourns, Mouser Part Number=652-CHP1206AFX-2001L, Datasheet Link=https://www.mouser.mx/datasheet/2/54/chp-a-1858677.pdf, Height=0.65mm, Manufacturer_Part_Number=CHP1206AFX-2001ELF, Mouser Price/Stock=https://www.mouser.co.uk/ProductDetail/Bourns/CHP1206AFX-2001ELF?qs=GedFDFLaBXERFI3Dnxqg6Q%3D%3D
S1: "Switch", Manufacturer_Name=E-Switch, Mouser Part Number=612-TL1030AF350AQJ, Datasheet Link=https://configured-product-images.s3.amazonaws.com/2D/specs/TL1030AF350AQJ.pdf, Height=1.95mm, Manufacturer_Part_Number=TL1030AF350AQJ, Mouser Price/Stock=https://www.mouser.co.uk/ProductDetail/E-Switch/TL1030AF350AQJ?qs=VVKQmw408U%2FgalG8VZqjEg%3D%3D

## Free pads (board coordinates)
  round 1.524 hole 3.35 unplated: 1(30.988,30.734) 1(30.988,121.666) 1(146.812,30.734) 1(146.812,121.666)

## Via types
v1: diameter 0.61, hole 0.3, Top Layer to Bottom Layer, 98 vias

## Nets (pads, with @x,y where several pads share a name; then routed paths per layer and width w, separated by ;. In a path a pad name is that pad's centre, name@x,y a point inside that pad or via, vN(x,y) a via of type N, cw(c..) or ccw(c..) an arc to the next point about the centre after c; other vN are vias at no path point)
3.3V: C4.1 C5.1 C6.1 C7.1 C8.1 C9.1 C10.1 C12.1 C13.1 C14.1 C16.1 C19.1 C20.1 C22.1 IC3.1 IC3.13 IC3.19 IC3.30 IC3.32 IC3.48 IC3.64 IC4.4 IC4.5 IC6.1 IC7.2 IC7.3 J9.3 LED3.2 R20.1 R21.1 | length 146.7
  Top Layer w0.279: J9.3 42.848,55.081 47.752,55.081 47.792,55.121 C13.1@50.571,55.121 ; IC4.4 IC4.5 ; v1(49.702,78.252) 49.641,78.313 48.992,78.313 48.406,78.898 48.406,79.698 48.221,79.883 IC4.5 ; C13.1 50.803,54.864 51.943,54.864 52.223,55.144 53.053,55.144 IC3.13 54.011,55.154 55.644,56.787 55.644,60.824 ; IC3.64 55.051,61.477 ; C10.1@56.01,48.768 56.051,48.809 IC3.19 56.051,52.629 56.273,52.851 61.272,52.851 61.551,52.571 IC3.30 ; IC3.30@61.551,51.078 61.551,50.755 61.659,50.647 62.551,50.647 ; IC3.32@62.551,52.253 62.551,50.647 ; IC3.32@62.561,52.264 62.881,52.584 62.881,60.824 ; C14.1@63.486,46.939 63.479,46.946 63.624,47.091 C9.1 ; C9.1@63.599,49.2 63.599,49.6 62.551,50.647 ; C8.1 66.628,61.799 65.771,61.799 65.137,61.164 64.549,61.164 IC3.48 63.212,61.154 62.881,60.824 ; IC4.5 45.517,79.883 44.577,78.943 C16.1 44.577,75.212 LED3.2 43.995,74.574 43.995,74.523 41.377,71.905 41.377,62.535 42.265,61.646 42.658,61.646 43.093,61.211 C5.1 C6.1 C7.1 50.222,61.154 IC3.1 54.728,61.154 55.051,61.477 ; 55.051,61.477 55.644,60.884 55.644,60.824 ; 55.644,60.824 62.881,60.824
  Top Layer w0.381: v1(56.185,78.257) 58.458,80.53 62.824,80.53 R21.1 63.24,80.596 64.439,81.795 65.309,81.795 65.835,82.321 67.624,82.321 68.812,83.509 ; C19.1@68.812,87.325 C19.1@68.812,86.925 ; IC7.3 C20.1 ; IC7.2 70.925,86.199 69.938,86.199 69.531,86.606 69.131,86.606 C19.1@68.812,86.925 ; C22.1@71.199,80.558 71.519,80.239 IC6.1 ; C22.1@71.199,80.721 71.199,81.121 68.812,83.509 ; 68.812,83.509 C20.1 ; C20.1 C19.1@68.812,86.925
  Bottom Layer w0.279: v1(49.702,78.252) 49.705,78.255 56.182,78.255 v1(56.185,78.257)
"3.3V (High Side)": C17.1 C18.1 C21.1 IC5.8 IC6.8 IC7.7 R18.1 R19.1 | length 23.4
  Top Layer w0.3: R18.1@86.456,79.758 87.241,80.543 IC5.8
  Top Layer w0.381: C18.1 85.52,86.386 83.111,86.386 C17.1 82.826,86.157 79.792,86.157 78.41,84.775 IC6.8 80.045,80.239 80.575,79.708 C21.1 81,79.733 83.465,79.733 R19.1 R18.1 R18.1@86.456,79.758
12V: "+ Sig.2" "- Sig.2" "PC Sig.2" C3.1 C15.1 IC2.5 IC4.1 IC4.2 LED2.2 | length 106
  Top Layer w0.279: LED2.2 49.81,98.354 IC2.5 ; C15.1 44.653,86.704 44.653,85.827 45.517,84.963 IC4.1@47.498,84.963 ; IC4.1 48.221,84.963 50.024,86.766 v1(53.188,86.766) ; v1(64.338,70.206) 64.389,70.206 68.885,65.71 68.885,64.44 72.771,60.554 93.825,60.554 97.203,57.175 97.253,57.175 97.864,56.565 97.864,56.515 97.864,51.308 97.864,46.101
  Top Layer w0.889: IC4.1@47.498,84.963 47.498,90.706 49.989,93.197 C3.1 49.989,93.747 50.673,94.431 IC2.5 ; IC4.2 IC4.1
  Bottom Layer w0.279: v1(53.188,86.766) 56.185,86.766 58.75,84.201 58.75,75.768 64.313,70.206 v1(64.338,70.206)
"12V Unfused": C2.1 D1.1 D2.1 D3.1 IC2.4 J1.1 J2.3 J4.2 J6.2 J7.2 K1.3 R8.1 | length 254
  Top Layer w0.279: J2.3 45.359,100.48 47.025,102.146 47.025,102.503 47.395,102.873 C2.1 ; IC2.4@50.631,102.873 50.652,102.894 IC2.4 ; J4.2 68.367,34.181 D1.1 ; J6.2 84.605,37.262 84.623,37.28 D2.1
  Top Layer w0.889: C2.1 47.773,102.894 C2.1@48.173,102.894 ; J1.1 51.311,118.767 53.34,116.738 53.34,113.055 48.284,107.999 R8.1 48.284,103.005 C2.1@48.173,102.894 ; C2.1@48.152,102.873 C2.1@48.173,102.894 ; IC2.4@50.652,102.894 C2.1@48.173,102.894 ; J7.2 100.414,33.866 D3.1@100.414,41.907 ; D3.1 100.848,41.907 101.203,42.262 101.203,42.612 106.807,48.216 K1.3
  Bottom Layer w2.54: J1.1 48.026,118.764 48.026,117.978 44.017,113.969 34.375,113.969 28.27,107.863 28.27,41.326 39.192,30.404 65.024,30.404 67.912,33.291 67.912,33.726 J4.2 67.972,33.782 68.618,33.137 71.401,30.353 81.497,30.353 84.602,33.458 84.602,33.775 J6.2@84.605,33.778 ; J6.2@84.608,33.779 88.136,30.251 98.094,30.251 100.327,32.484 100.327,33.779 J7.2
"+ Relay GND": D1.2 J4.1 Q1.3 | length 11.7
  Top Layer w0.279: D1.2 63.839,42.035 Q1.3 61.558,36.232 J4.1
"+ Signal": IC3.37 ICLED3.1 Q1.1 | length 36.3
  Top Layer w0.279: Q1.1 61.885,42.985 64.694,45.794 64.694,51.105 63.525,52.273 63.525,55.654 IC3.37 72.774,55.654 74.651,57.531 ICLED3.1
"- Relay GND": D2.2 J6.1 Q2.3 | length 11.4
  Top Layer w0.279: D2.2 81.072,41.246 81.072,34.209 J6.1
  Top Layer w0.61: Q2.3 77.647,42.029 80.1,42.029 D2.2
"- Signal": IC3.35 ICLED2.1 Q2.1 | length 27.7
  Top Layer w0.279: IC3.35 72.784,54.654 75.266,52.172 ; Q2.1 75.266,52.172 ; ICLED2.1 81.859,52.172 75.266,52.172
EN/UVLO: IC2.3 R8.2 R10.1 | length 20.3
  Top Layer w0.279: IC2.3 51.943,103.353 51.284,104.011 R8.2 51.284,106.43 53.134,108.28 59.043,108.28 59.969,107.354 59.969,103.352 58.164,101.547 R10.1
GND: C1.2 C2.2 C3.2 C4.2 C5.2 C6.2 C7.2 C8.2 C9.2 C10.2 C11.2 C12.2 C13.2 C14.2 C15.2 C16.2 C19.2 C20.2 C22.2 IC1LED1.2 IC2.1 IC2.9 IC3.12 IC3.18 IC3.31 IC3.47 IC3.60 IC3.63 IC4.3 IC4.6 IC6.4 IC7.1 IC7.4 ICLED2.2 ICLED3.2 J1.2 J2.2 J9.4 Q1.2 Q2.2 Q3.2 R7.2 R9.2 R11.2 R14.2 S1.2 S1.4
  other v1: 35.56,30.48 73.66,35.56 45.72,40.64 55.88,40.64 66.04,40.64 71.12,40.64 86.36,40.64 43.18,45.72 48.26,45.72 53.34,45.72 68.58,45.72 88.9,45.72 48.158,48.539 50.724,48.539 69.063,48.819 40.64,50.8 71.12,50.8 76.2,50.8 101.6,50.8 49.2,50.978 58.42,55.88 78.74,55.88 88.9,55.88 104.14,55.88 30.48,60.96 35.56,60.96 40.64,60.96 71.12,60.96 96.52,60.96 101.6,60.96 43.053,65.989 45.415,65.989 47.777,65.989 50.14,65.989 66.802,66.142 45.72,71.12 50.8,71.12 66.04,71.12 33.02,76.2 38.1,76.2 71.35,76.454 67.184,80.594 50.8,81.28 60.96,81.28 72.763,81.682 64.491,84.861 58.42,86.36 64.491,87.351 70.731,89.76 30.48,91.44 35.56,91.44 40.64,91.44 50.8,91.44 55.88,91.44 60.96,91.44 66.04,91.44 43.18,96.52 48.26,96.52 58.42,96.52 63.5,96.52 68.58,96.52 51.528,99.528 53.603,99.528 52.578,100.203 51.528,100.903 53.603,100.903 40.64,101.6 66.04,101.6 63.5,106.68 68.58,106.68 40.64,111.76 45.72,111.76 55.88,111.76 60.96,111.76 66.04,111.76 33.02,116.84 38.1,116.84 58.42,116.84 63.5,116.84 68.58,116.84 35.56,121.92 55.88,121.92 60.96,121.92 66.04,121.92
"HV+ BAT": J3.1 J3.2 K1.1
"HV+ MC Unfused": F2.2 J5.1 J5.2 R5.2 R5.3 | length 15
  Top Layer w0.279: R5.3 118.865,93.091 F2.2
"HV+ ÷ 8": IC5.1 IC5.2 IC5.3 R15.2 R16.1 R17.1 | length 11
  Top Layer w0.3: IC5.2 IC5.3
  Top Layer w0.381: IC5.2 IC5.1 93.259,78.114 92.762,77.617 R17.1 92.762,77.039 93.171,76.63 R16.1 99.032,76.63 99.494,77.091 R15.2
HV-: C17.2 C18.2 C21.2 F1.2 IC5.4 IC5.5 IC5.9 IC6.5 IC7.5 IC7.6 IC7.8 R16.2 | length 55.5
  Top Layer w0.3: IC5.4 IC5.5
  Top Layer w0.381: IC6.5 80.096,76.429 80.575,76.908 C21.2 82.165,76.908 82.31,76.762 82.31,76.192 82.474,76.029 87.122,76.029 87.583,76.49 87.583,79.759 87.867,80.043 IC5.9 90.309,80.043 91.809,81.543 IC5.5 93.964,81.543 94.238,81.543 ; IC7.6 IC7.5 80.419,83.615 83.082,83.615 C17.2 83.096,83.626 85.535,83.626 C18.2 85.881,83.973 86.564,83.973 86.919,84.328 ; IC7.8 86.563,87.427 86.919,87.071 86.919,84.328 ; F1.2@96.52,84.328 86.919,84.328 ; F1.2@96.634,84.214 96.634,83.939 94.238,81.543 ; R16.2 96.474,79.53 94.461,81.543 94.238,81.543
"HV- MC Unfused": F1.1 J8.1 J8.2 | length 12.5
  Top Layer w0.279: J8.2 J8.1 91.948,118.566 97.028,113.486 F1.1
NetC1_1: C1.1 IC2.2 | length 3.4
  Top Layer w0.279: IC2.2 53.213,104.14 53.845,104.772 C1.1
NetF2_1: F2.1 R15.1 | length 25.6
  Top Layer w0.381: R15.1@102.69,77.241 102.715,77.216 v1(111.125,77.216)
  Bottom Layer w0.279: v1(111.125,77.216) 111.189,77.216 123.254,65.151 F2.1
NetIC1_U_LED1_3: IC1LED1.3 R6LED1.2 | length 2.9
  Top Layer w0.279: IC1LED1.3 R6LED1.2
NetIC1_U_LED2_3: ICLED2.3 R6LED2.2 | length 3
  Top Layer w0.279: ICLED2.3 86.995,51.336 R6LED2.2
NetIC1_U_LED3_3: ICLED3.3 R6LED3.2 | length 3
  Top Layer w0.279: ICLED3.3 86.967,56.571 R6LED3.2
NetIC2_7: IC2.7 R7.1 | length 4.4
  Top Layer w0.279: IC2.7 53.213,95.887 54.028,95.072 R7.1
NetIC3_21: IC3.21 J12.1 | length 24.4
  Top Layer w0.279: J12.1 43.162,34.612 43.985,34.612 57.051,47.678 IC3.21
NetIC3_23: IC3.23 J12.2 | length 22.7
  Top Layer w0.279: J12.2 46.332,35.562 58.051,47.281 IC3.23
NetIC3_25: IC3.25 J12.3 | length 21.5
  Top Layer w0.279: J12.3 50.292,38.202 59.051,46.961 IC3.25
NetIC3_27: IC3.27 J12.4 | length 20.2
  Top Layer w0.279: J12.4 54.252,40.716 60.051,46.515 IC3.27
NetIC3_58: IC3.58 R13.2 | length 4.8
  Top Layer w0.279: IC3.58 58.051,66.077 58.522,66.548 R13.2
NetIC3_59: IC3.59 R12.2 | length 4.5
  Top Layer w0.279: R12.2 57.302,66.548 57.551,66.299 IC3.59
NetIC5_10: IC5.10 R17.2 | length 2.9
  Top Layer w0.3: IC5.10 89.328,79.543 IC5.10@89.369,79.503
  Top Layer w0.381: IC5.10@89.369,79.503 89.369,79.446 89.408,79.406 89.408,77.62 R17.2
NetK1_2: K1.2 R1.1 R1.4
NetLED1_U_LED1_1: "PC Sig.1" R6LED1.1 | length 3.9
  Top Layer w0.279: R6LED1.1 94.364,46.101
NetLED1_U_LED2_1: "- Sig.1" R6LED2.1 | length 3.9
  Top Layer w0.279: R6LED2.1 94.364,51.308
NetLED1_U_LED3_1: "+ Sig.1" R6LED3.1 | length 3.9
  Top Layer w0.279: R6LED3.1 94.364,56.515
NetLED2_1: LED2.1 R9.1 | length 5.1
  Top Layer w0.279: R9.1 44.069,106.055 LED2.1
NetLED3_1: LED3.1 R14.1 | length 3
  Top Layer w0.279: LED3.1 R14.1
NetR1_2: R1.2 R1.3 R2.1 R2.4 | length 20.8
  Top Layer w2.54: R1.2 R2.1
NetR2_2: R2.2 R2.3 R3.1 R3.4 | length 22.5
  Top Layer w2.54: R2.3 R3.4
NetR3_2: R3.2 R3.3 R4.1 R4.4 | length 20.8
  Top Layer w2.54: R3.2 R4.1
NetR4_2: R4.2 R4.3 R5.1 R5.4
NRST: C11.1 IC3.7 J10.2 S1.1 S1.3 | length 24.3
  Top Layer w0.279: J10.2 40.816,58.729 40.816,58.641 41.201,58.256 S1.1 S1.3 45.683,58.256 46.863,59.436 49.171,59.436 50.179,58.428 50.179,58.028 C11.1 51.537,57.658 52.033,58.154 IC3.7
OVLO: IC2.8 R10.2 R11.1 | length 8.3
  Top Layer w0.279: IC2.8 57.308,97.491 57.914,98.097 R10.2 R11.1
"PC Signal": IC1LED1.1 IC3.33 Q3.1 | length 38.7
  Top Layer w0.279: IC3.33 65.904,53.654 73.812,45.745 73.812,42.693 74.505,42 75.9,42 80.961,47.061 IC1LED1.1 82.804,47.061 82.804,44.374 83.978,43.2 91.012,43.2 91.057,43.155 91.12,43.155 91.268,43.007 Q3.1
"PC Switch COM": IC3.52 J2.4 | length 57
  Top Layer w0.279: v1(55.905,69.698) 59.207,69.698 61.051,67.854 IC3.52
  Bottom Layer w0.279: J2.4 33.695,93.457 30.926,90.688 30.926,80.834 42.062,69.698 v1(55.905,69.698)
"Precharge Relay GND": D3.2 J7.1 K1.4 Q3.3 | length 23
  Top Layer w0.61: D3.2 95.975,42.029 93.649,42.029 Q3.3 93.644,36.508 J7.1 98.656,31.496 K1.4@106.579,31.496
SCL: IC6.3 J11.2 R13.1 R21.2 | length 56
  Top Layer w0.381: v1(59.563,72.466) 63.193,68.836 ; R13.1 63.193,68.836 ; IC6.3 72.985,77.698 62.891,77.698 63.193,77.396 63.193,68.836
  Bottom Layer w0.279: J11.2 38.86,81.13 43.307,76.683 55.347,76.683 v1(59.563,72.466)
"SCL (High Side)": IC5.6 IC6.6 R19.2 | length 14.9
  Top Layer w0.3: v1(85.903,82.118) 87.815,82.118 88.39,81.543 IC5.6
  Top Layer w0.381: IC6.6 82.299,77.699 83.14,76.858 R19.2 83.414,76.934 v1(83.414,78.13)
  Bottom Layer w0.381: v1(83.414,78.13) 83.414,79.629 v1(85.903,82.118)
SDA: IC6.2 J11.1 R12.1 R20.2 | length 65.5
  Top Layer w0.279: J11.1 31.496,82.931 31.496,80.264 32.817,78.943 39.014,78.943 41.859,81.788 49.278,81.788 52.885,78.181 52.885,70.589 ; R12.1 52.885,70.589 ; IC6.2 65.481,78.969 61.265,78.969 52.885,70.589
"SDA (High Side)": IC5.7 IC6.7 R18.2 | length 15.4
  Top Layer w0.3: v1(86.592,81.067) 86.615,81.043 IC5.7
  Top Layer w0.381: IC6.7 78.46,78.919 83.995,78.919 85.396,77.517 85.396,77.218 85.474,77.14 R18.2@86.106,77.14 ; R18.2 R18.2@86.106,77.14 ; v1(86.191,78.114) 86.191,78.052 86.106,77.967 R18.2@86.106,77.14
  Bottom Layer w0.381: v1(86.191,78.114) 86.148,78.158 86.148,78.32 86.106,78.362 86.106,80.581 v1(86.592,81.067)
SWCLK: IC3.49 J9.1 | length 33.3
  Top Layer w0.279: v1(61.824,61.773) 61.885,61.834 62.266,61.834 62.541,62.109 62.541,63.132 IC3.49
  Bottom Layer w0.279: J9.1 40.045,60.198 60.249,60.198 v1(61.824,61.773)
SWDIO: IC3.46 J9.2 | length 40.2
  Top Layer w0.279: IC3.46 65.532,60.154 66.047,59.639 v1(66.047,56.496)
  Bottom Layer w0.279: J9.2 34.002,49.581 59.131,49.581 v1(66.047,56.496)
SWO: IC3.55 J10.1 | length 29.6
  Top Layer w0.279: v1(59.279,64.968) 59.279,64.881 59.551,64.609 IC3.55
  Bottom Layer w0.279: J10.1 38.537,64.968 v1(59.279,64.968)
pads on no net: IC2.6 IC3.2 IC3.3 IC3.4 IC3.5 IC3.6 IC3.8 IC3.9 IC3.10 IC3.11 IC3.14 IC3.15 IC3.16 IC3.17 IC3.20 IC3.22 IC3.24 IC3.26 IC3.28 IC3.29 IC3.34 IC3.36 IC3.38 IC3.39 IC3.40 IC3.41 IC3.42 IC3.43 IC3.44 IC3.45 IC3.50 IC3.51 IC3.53 IC3.54 IC3.56 IC3.57 IC3.61 IC3.62 J1.3 J2.1 J2.5 J3.3 J4.3 J5.3 J6.3 J7.3 J8.3 J9.5 J10.3 J11.3 J12.5

## Polygon pours and split planes (outlines as drawn)
GND on Top Layer "GND_L01_P006" (solid, pour order 6): 25.455,34.535 25.455,25.645 34.345,25.645 114.609,25.645 114.609,60.57 106.354,68.825 75.239,68.825 75.239,127.245 25.455,127.245
"HV+ MC Unfused" on Top Layer "HV+_MC_UNFUSED_L01_P010" (solid, pour order 10): 109.22,120.396 109.22,100.076 110.236,99.06 112.776,99.06 113.792,100.076 113.792,115.824 114.808,116.84 116.84,116.84 117.348,117.348 117.348,120.396 116.84,120.904 109.728,120.904
NetK1_2 on Top Layer "NETK1_2_L01_P009" (solid, pour order 9): 120.98,56.718 120.98,54.28 129.032,46.228 137.16,46.228 138.684,47.752 138.684,56.642 137.414,57.912 122.174,57.912
NetR4_2 on Top Layer "NETR4_2_L01_P008" (solid, pour order 8): 117.856,105.156 117.856,100.076 118.872,99.06 136.652,99.06 137.668,100.076 137.668,105.156 136.652,106.172 118.872,106.172
"HV+ BAT" on Top Layer "HV+_BAT_L01_P007" (solid, pour order 7): 120.98,29.286 120.98,26.848 121.92,25.908 137.668,25.908 139.192,27.432 139.192,34.036 137.668,35.56 127.254,35.56
no net on Top Overlay (hatched 45Degree grid 1 track 0.254): 75.833,62.517 cw(c75.833,68.867) 73.991,74.945 73.991,89.307 cw(c75.833,95.385) 69.483,95.385 69.483,133.866 cw(c75.833,133.866) 82.183,133.866 82.183,95.385 cw(c75.833,95.385) 77.675,89.307 77.675,75.218 106.796,75.218 cw(c106.796,68.867) 111.287,73.357 111.286,73.358 119.058,65.585 119.058,65.586 cw(c114.568,61.095) 120.918,61.095 120.918,18.042 cw(c114.568,18.042) 108.218,18.042 108.218,58.464 104.165,62.517
GND on Bottom Layer "GND_L02_P001" (solid, pour order 1): 25.4,34.29 25.4,25.4 34.29,25.4 114.554,25.4 114.554,60.325 106.299,68.58 75.184,68.58 75.184,127 25.4,127
no net on Bottom Overlay (hatched 45Degree grid 1 track 0.254): 75.833,62.517 cw(c75.833,68.867) 73.991,74.945 73.991,89.307 cw(c75.833,95.385) 69.483,95.385 69.483,133.866 cw(c75.833,133.866) 82.183,133.866 82.183,95.385 cw(c75.833,95.385) 77.675,89.307 77.675,75.218 106.796,75.218 cw(c106.796,68.867) 111.287,73.357 111.286,73.358 119.058,65.585 119.058,65.586 cw(c114.568,61.095) 120.918,61.095 120.918,18.042 cw(c114.568,18.042) 108.218,18.042 108.218,58.464 104.165,62.517

## Keep-outs
Keep-Out Layer:
  lines w3.683: 75.692,68.859 75.692,95.377 ; 75.699,68.854 75.699,95.372
  lines w12.7: 75.692,68.859 106.655,68.859 114.427,61.087 114.427,18.034 ; 75.692,95.377 75.692,133.858 ; 75.699,68.854 106.662,68.854 114.434,61.082 114.434,18.029 ; 75.699,95.372 75.699,133.853

## Silkscreen, mask and mechanical layers (free items; w line width, h text height)
Top Overlay:
  drawing of 64 lines, arcs and shapes, not listed
  text "GND" at 42.418,113.03 h0.76
  text "12V Unfused" at 46.228,113.03 h0.76
  text "HV- MC" at 85.651,111.506 h1.52
  text "HV+ MC" at 109.804,111.506 h1.52
  text "eFuse" at 40.64,110.49 h1.52
  text "GND" at 38.608,103.378 h0.76 r90
  text "12V / Unfused" at 40.386,96.14 h0.76 r90
  text "PC Switch / COM" at 40.386,90.805 h0.76 r90
  text "Voltage / Sense" at 82.575,89.459 h1.52
  text "LDO" at 42.164,88.646 h1.52
  text "SDA" at 39.116,84.074 h0.76 r90
  text "SCL" at 39.116,80.264 h0.76 r90
  text "Relay Controller / REV3 (09/2025) / Designed by / Bryan Lew" at 100.076,78.994 h1
  text "STM32" at 40.132,69.596 h1.52
  text "SWO" at 39.116,68.58 h0.76 r90
  text "NRST" at 39.116,64.516 h0.76 r90
  text "LEDs" at 80.874,60.579 h1.52
  text "SWCLK" at 39.116,52.578 h0.76 r90
  text "SWDIO" at 39.116,48.006 h0.76 r90
  text "3.3V" at 39.116,44.196 h0.76 r90
  text "GND" at 39.116,40.894 h0.76 r90
  text "HV+ BAT" at 127.839,39.624 h1.52
  text "GPIO1" at 40.894,38.862 h0.76
  text "GPIO2" at 44.873,38.862 h0.76
  text "GPIO3" at 49.107,38.862 h0.76
  text "GPIO4" at 53.34,38.862 h0.76
  text "+R GND" at 60.198,38.354 h0.76
  text "12V Unfused" at 65.786,38.354 h0.76
  text "-R GND" at 75.946,38.354 h0.76
  text "12V Unfused" at 82.042,38.354 h0.76
  text "PCR GND" at 91.694,38.354 h0.76
  text "12V Unfused" at 97.79,38.354 h0.76
Bottom Overlay:
  lines w0.254: 50.165,98.349 54.991,98.349 54.991,102.133 50.165,102.133 50.165,98.349
  text "Thermal Vias" at 57.11,102.387 h0.8
Mechanical 1:
  lines w0.254: 25.4,34.29 ccw(c34.29,34.29) 34.29,25.4 143.764,25.4 ccw(c143.764,34.29) 152.654,34.29 152.654,118.11 ccw(c143.764,118.11) 143.764,127 34.29,127 ccw(c34.29,118.11) 25.4,118.11 25.4,34.29
  lines w1.27: 75.692,68.834 75.692,95.758